# EAGLE board DotControl (EAGLE 7.7.0)
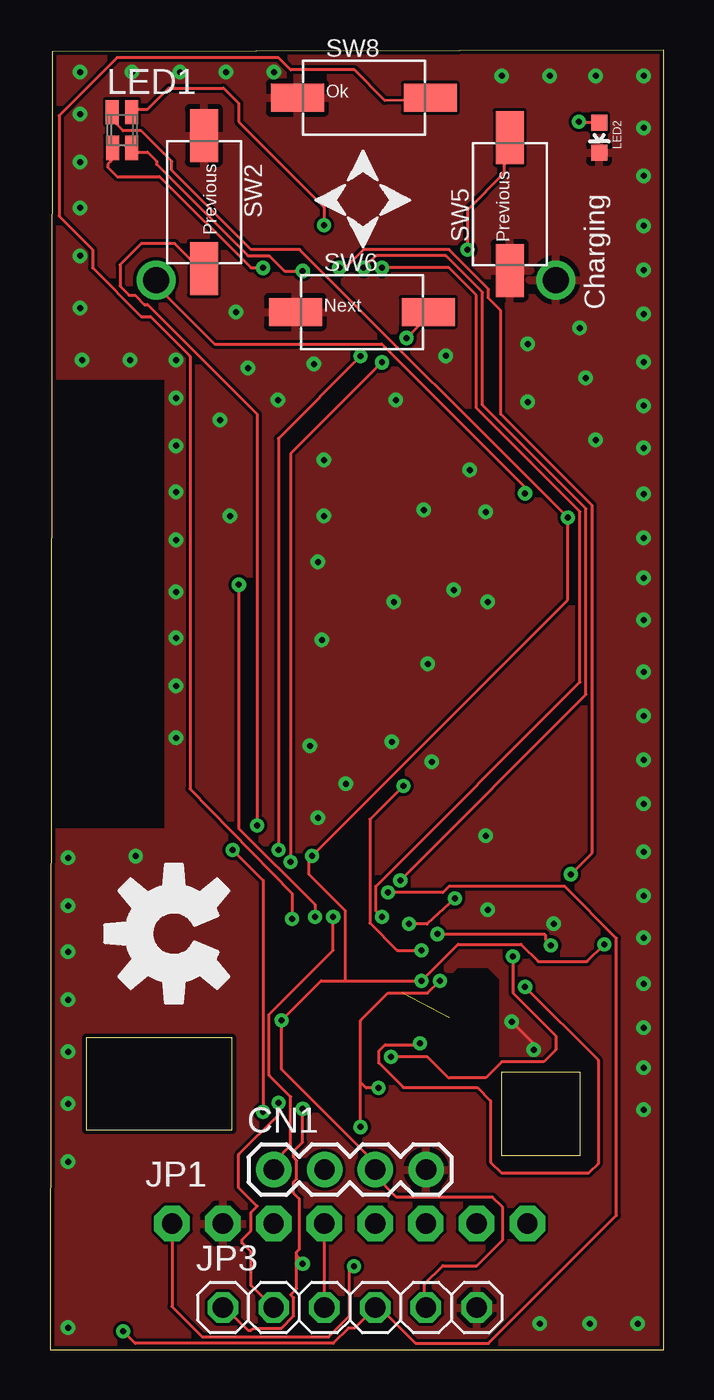
[diagram p0: board, top side]
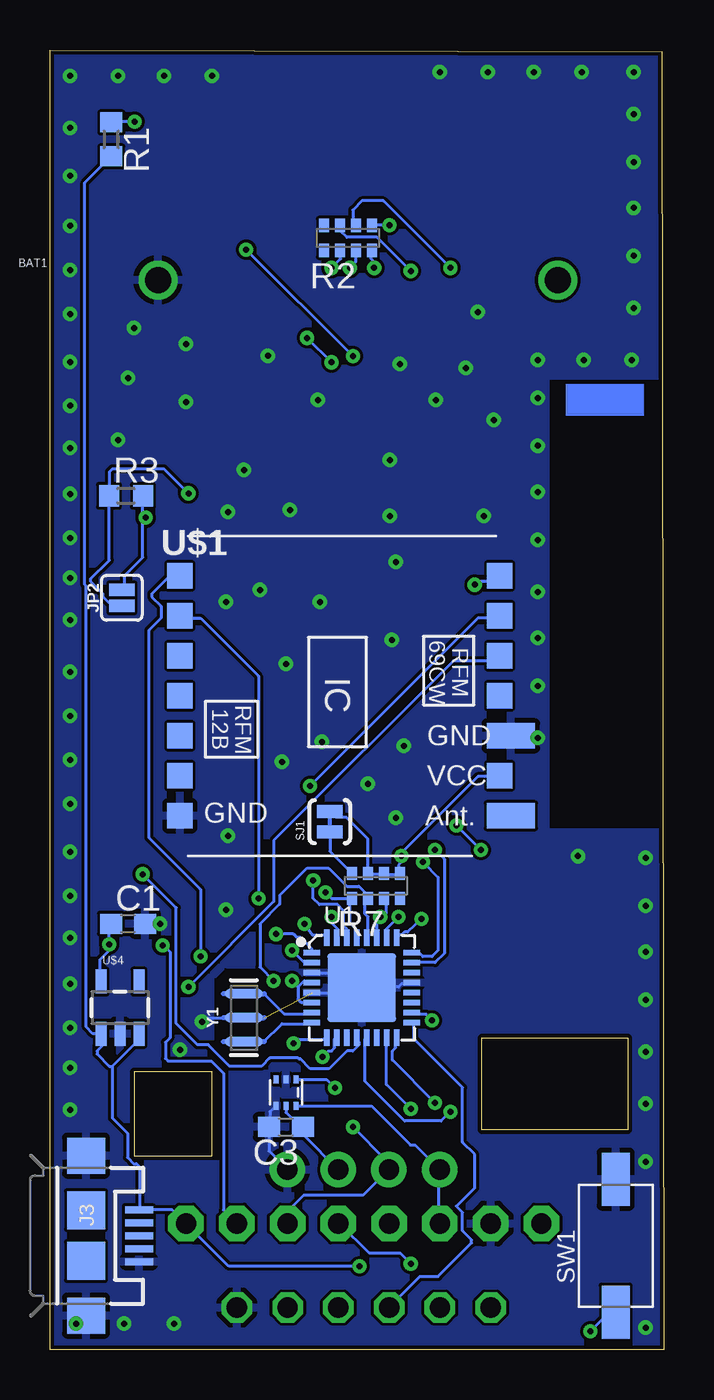
[diagram p1: board, bottom side, seen from below]

Size 30.7 x 65 mm. Coordinates in mm from the lower left corner, seen from the top.
Outline: 0,0 30.7,0 30.7,65 0.1,64.9 0,0
Outline: 22.6,13.9 26.5,13.9 26.5,9.7 22.6,9.7 22.6,13.9
Outline: 9.1,15.6 1.8,15.6 1.8,11 9.1,11 9.1,15.6
Copper layers (1*16): Top 0.035mm / dielectric 1.5mm / Bottom 0.035mm
Design rules "Mihai_default": minimum track width 6mil, minimum drill 0.3mm, track to track 6mil, track to pad 6mil, pad to pad 6mil, via to via 6mil, smd to smd 6mil, copper to edge 8mil, drill to drill 8mil, minimum pad ring 10mil, minimum via ring 8mil, stop-mask expansion 4mil, vias tented up to drill 0mil, thermal gap 10mil
tRestrict: area 17.1,14.4 to 22.4,19; area 0.4,26.1 to 5.7,48.5
bRestrict: area 17.1,14.4 to 22.4,19; area 0.4,26.1 to 5.7,48.5

## Footprints (pad centres in the part's own frame; a part is rotated, then mirrored left to right if it is on the bottom)
BATTCOM_20MM_PTH = drill 1.3: 1 20,0; 2 0,0
C0603 = smd 1.1 x 1: 1 -0.85,0; 2 0.85,0
1X04-BIG = drill 1.016 pad 1.778: 1 0,0; 2 2.54,0; 3 5.08,0; 4 7.62,0
USB-MICROB = smd 0.35 x 1.4: D+ 0,2.65; D- -0.65,2.65; GND 1.3,2.65; ID 0.65,2.65; VBUS -1.3,2.65 | smd 1.8 x 1.9: MT1 -4,0; MT2 4,0 | smd 1.9 x 1.9: P$1 -1.27,0; P$2 1.27,0
1X08-CLEANBIG = drill 1.016 pad 1.778 octagon: 1 -8.89,0; 2 -6.35,0; 3 -3.81,0; 4 -1.27,0; 5 1.27,0; 6 3.81,0; 7 6.35,0; 8 8.89,0
SMT-JUMPER_2_NO_SILK = smd 0.635 x 1.27: 1 -0.406,0; 2 0.406,0
1X06 = drill 1.016 octagon: 1 -6.35,0; 2 -3.81,0; 3 -1.27,0; 4 1.27,0; 5 3.81,0; 6 6.35,0
GM1WA55311A = smd 0.65 x 1.2: 1 0.477,0.9; 2 -0.475,-0.9; 3 0.475,-0.9; 4 -0.477,0.9
LED-0603 = smd 0.8 x 0.8: A 0,-0.75; C 0,0.75
R0603 = smd 1 x 1.1: 1 -0.85,0; 2 0.85,0
0603-ARV = smd 0.5 x 0.65: 1 -1.2,-0.625; 2 -0.4,-0.625; 3 0.4,-0.625; 4 1.2,-0.625; 5 1.2,0.625; 6 0.4,0.625; 7 -0.4,0.625; 8 -1.2,0.625
SJ_2S-TRACE = smd 0.635 x 1.27: 1 -0.508,0; 2 0.508,0
SW2-4.0-6.0X3.0X2.5MM = smd 2.65 x 1.4: 1 -3.325,0; 2 3.325,0
QFN32G-0.5-5X5MM = smd 0.813 x 0.279: 1 -2.5,1.75; 2 -2.5,1.25; 3 -2.5,0.75; 4 -2.5,0.25; 5 -2.5,-0.25; 6 -2.5,-0.75; 7 -2.5,-1.25; 8 -2.5,-1.75; 17 2.5,-1.75; 18 2.5,-1.25; 19 2.5,-0.75; 20 2.5,-0.25; 21 2.5,0.25; 22 2.5,0.75; 23 2.5,1.25; 24 2.5,1.75 | smd 0.279 x 0.813: 9 -1.75,-2.5; 10 -1.25,-2.5; 11 -0.75,-2.5; 12 -0.25,-2.5; 13 0.25,-2.5; 14 0.75,-2.5; 15 1.25,-2.5; 16 1.75,-2.5; 25 1.75,2.5; 26 1.25,2.5; 27 0.75,2.5; 28 0.25,2.5; 29 -0.25,2.5; 30 -0.75,2.5; 31 -1.25,2.5; 32 -1.75,2.5 | smd 3.429 x 3.429: 33 0,0
SOT563 = smd 0.25 x 0.4: 1 -0.5,-0.66; 2 0,-0.66; 3 0.5,-0.66; 4 0.5,0.66; 5 0,0.66; 6 -0.5,0.67
RFM12B/69CW = smd 2.413 x 1.27: ANT 9.06,-6; GND 9.06,-2 | smd 1.27 x 1.27: CLK -7.5,-2; FFIT -7.5,0; FFS -7.5,2; GND1 -7.5,-6; IRQ -7.5,4; NINT 8.5,0; RST -7.5,-4; SCK 8.5,4; SDI 8.5,2; SDO -7.5,6; SEL 8.5,6; VDD 8.5,-4
SOT23-5 = smd 0.55 x 1.2: 1 -0.95,-1.3; 2 0,-1.3; 3 0.95,-1.3; 4 0.95,1.3; 5 -0.95,1.3
RESONATOR-SMD-3.2X1.3 = smd 0.45 x 1.905: 1 -1.2,0; 2 0,0; 3 1.2,0

## Placement (x,y rotation side)
BAT1  [BATTCOM_20MM_PTH]  25.3,53.5 0 bottom
C1  [C0603]  26.8,21.3 0 bottom
C3  0.1uF  [C0603]  18.9,11.13 180 bottom
CN1  1X4-BIG  [1X04-BIG]  11.2,9 0 top
J3  USB-MICROB  [USB-MICROB]  28.9,5.7 270 bottom
JP1  [1X08-CLEANBIG]  15,6.3 0 top
JP2  JUMPER-SMT_2_NO_SILK  [SMT-JUMPER_2_NO_SILK]  27.1,37.6 90 bottom
JP3  [1X06]  15,2.1 0 top
LED1  GM1WA55311A  [GM1WA55311A]  3.6,61 0 top
LED2  [LED-0603]  27.48,60.6 180 top
R1  [R0603]  27.64,60.53 270 bottom
R2  [0603-ARV]  15.8,55.6 0 bottom
R3  [R0603]  26.9,42.7 0 bottom
R7  4.7kΩ  [0603-ARV]  14.4,23.2 0 bottom
SJ1  SOLDERJUMPERTRACE  [SJ_2S-TRACE]  16.7,26.4 90 bottom
SW1  [SW2-4.0-6.0X3.0X2.5MM]  2.4,5.2 90 bottom
SW2  Previous  [SW2-4.0-6.0X3.0X2.5MM]  7.7,57.4 270 top
SW5  Previous  [SW2-4.0-6.0X3.0X2.5MM]  23,57.3 90 top
SW6  Next  [SW2-4.0-6.0X3.0X2.5MM]  15.6,51.9 0 top
SW8  Ok  [SW2-4.0-6.0X3.0X2.5MM]  15.7,62.61 0 top
U1  ATMEGA328P-MU-QFN32  [QFN32G-0.5-5X5MM]  15.1,18.1 0 bottom
U2  TMP102  [SOT563]  18.9,12.85 180 bottom
U$1  RFM12B/69CW  [RFM12B/69CW]  16.7,32.7 0 bottom
U$2  OSHW-LOGOL  [OSHW-LOGO-L]  6.2,20.8 90 top
U$4  LDCL015  [SOT23-5]  27.2,17.1 0 bottom
Y1  [RESONATOR-SMD-3.2X1.3]  21,16.6 90 bottom

## Library data of the parts
BAT1 = Battery
C1 = rcl
C3 R1 R3 = resistor
CN1 JP1 JP3 = adafruit
J3 = SparkFun-Retired; PROD_ID: CONN-09505
JP2 = SparkFun-Jumpers
LED1 = led
LED2 R2 R7 SJ1 U2 U$2 = SparkFun
SW1 SW2 SW5 SW6 SW8 = Seeed-OPL-Switch
U1 = Seeed-OPL-ic; MPN: ATMEGA328P-MU
U$1 = rfm12b_withoutPlanes
U$4 = LDCL015
Y1 = SparkFun-Clocks

## Nets
+3V3: C1.1 C3.1 CN1.3 JP2.2 JP3.5 LED1.4 R3.2 R7.5 R7.6 R7.7 SJ1.2 U1.4 U1.6 U1.18 U2.5 U$1.VDD U$4.5
+5V: J3.VBUS JP1.1 JP1.8 R1.2 U$4.1 U$4.3
ADC: U1.19
ADCENA: SW2.2 U1.13
BUZZER: SW5.2 U1.23
DISPLAY_A0: JP1.5
DISPLAY_CS: JP1.3
DISPLAY_RESET: JP1.4
DISPLAY_SDA: JP1.6
GND: BAT1.2 C1.2 C3.2 CN1.4 J3.GND J3.MT1 J3.MT2 JP1.2 JP3.6 LED2.C SW1.2 SW2.1 SW5.1 SW6.1 SW8.1 U1.3 U1.5 U1.21 U1.33 U2.2 U2.4 U$1.GND U$1.GND1 U$4.2 Y1.2
INT_MULTIPLE: U2.3
LED: R2.4 U1.12
LIGHT_SENSE: U1.22
MISO: JP3.2 U1.16
MOSI: JP3.1 U1.15
MOVE_INT: SW8.2 U1.25
N$1: LED2.A R1.1
N$2: R7.8 SJ1.1
N$6: U1.7 Y1.3
N$8: U1.8 Y1.1
N$9: LED1.3 R2.7
N$10: LED1.2 R2.6
N$15: LED1.1 R2.5
N$16: BAT1.1 JP2.1 R3.1
OUTA: U1.14
OUTB: SW6.2 U1.24
PUSH: JP1.7 U1.1
RADIO_ON: U1.11
RIRQ: U1.32 U$1.IRQ
RSCK: U1.2 U$1.SCK
RSDI: U1.9 U$1.SDI
RSDO: U1.10 U$1.SDO
RSEL: U1.26 U$1.SEL
RST: JP3.4 R7.1 SW1.1 U1.29
RXD: R2.3 U1.30
SCK: JP3.3 U1.17
SCL: CN1.2 R7.2 U1.28 U2.1
SDA: CN1.1 R7.3 U1.27 U2.6
TXD: R2.2 U1.31

## Tracks (layer width: path | path; a pad name or v marks a point on that pad's centre or on a via)
+3V3  (via drill 0.3)
  Top 0.152: LED1.4 3.2,61.87 3.2,61.42 3.66,60.96 4.57,60.96 6.1,59.44 6.1,58.98 10.06,55.02 12.5,55.02 v25.91,41.6 25.91,37.49 v13.11,24.69 12.95,24.69 12.95,23.77 14.78,21.95 14.78,18.44 | CN1.3 16.15,9.14 16.15,9.45 11.58,14.02 v11.58,16.46 13.56,18.44 14.78,18.44 | 14.78,18.44 v18.59,18.44 20.42,20.27 23.57,20.27 24.43,19.41 26.87,19.41 v27.74,20.27 | 16.31,8.69 16.31,8.99 CN1.3 | JP3.5 18.75,2.13 18.75,3.28 19.66,4.19 21.36,4.19 22.66,5.49 22.66,7.11 22.15,7.62 17.35,7.62 16.28,8.69 CN1.3
  Bottom 0.152: 26.06,41.6 26.06,39.62 26.98,38.71 26.98,38.25 26.82,38.1 26.98,37.95 JP2.2 | 26.06,41.6 26.06,42.67 R3.2 | 26.06,41.6 v25.91,41.6 | U$1.VDD 8.23,28.65 9.3,28.65 13.11,24.84 v13.11,24.69 13.11,24.38 13.26,24.23 13.26,23.93 R7.5 13.26,23.77 13.87,23.77 R7.6 14.02,23.77 14.78,23.77 R7.7 14.8,25.54 15.88,26.62 16.41,26.62 SJ1.2 | C1.1 27.74,21.18 v27.74,20.27 27.74,19.96 28.19,19.51 28.19,18.44 U$4.5 | 18.29,18.14 18.29,17.53 18.14,17.37 17.68,17.37 U1.6 | 18.29,18.14 17.98,18.44 17.83,18.29 17.68,18.29 U1.4 | v11.58,16.46 11.89,16.76 12.5,16.76 U1.18 | v18.59,18.44 18.29,18.14 | U2.5 18.9,11.86 18.62,11.58 18.5,11.58 C3.1 18.05,10.77 CN1.3
+5V  (via drill 0.3)
  Top 0.152: JP1.1 6.11,2.15 7.62,0.64 13.95,0.64 14.99,1.68 14.99,3.94 v15.21,4.17
  Bottom 0.152: 27.58,14.17 26.36,15.39 26.36,15.7 U$4.3 | 27.58,14.17 27.74,14.17 28.35,14.78 28.35,14.94 28.04,15.24 28.04,15.7 U$4.1 28.55,15.8 28.88,16.13 28.88,38.18 28.96,38.25 28.96,58.36 R1.2 | 26.21,7.01 26.21,9.14 26.36,9.3 26.52,9.3 26.82,9.6 26.82,10.82 27.58,11.58 27.58,14.17 | 26.21,7.01 J3.VBUS | v15.21,4.17 21.76,4.17 JP1.8 24.6,7.01 26.21,7.01
ADCENA  (via drill 0.3)
  Top 0.152: v10.67,11.89 10.67,23.47 v9.14,24.99 | v10.36,26.21 10.36,46.79 4.88,52.27 4.72,52.27 4.27,52.73 3.96,52.73 3.5,53.19 3.5,54.25 4.57,55.32 6.25,55.32 7.62,53.95 SW2.2
  Bottom 0.152: v10.67,11.89 11.12,11.43 12.95,11.43 14.94,13.41 14.94,15.54 U1.13 | v10.36,26.21 v9.14,24.99
BUZZER  (via drill 0.3)
  Top 0.152: v11.43,24.99 11.43,45.57 v15.54,49.68 | v20.88,55.02 20.88,57 22.71,58.83 22.71,60.35 22.86,60.5 SW5.2
  Bottom 0.152: v11.43,24.99 10.97,24.54 10.97,19.81 11.43,19.36 12.5,19.36 U1.23 | v20.88,55.02 v15.54,49.68
GND  (via drill 0.3)  (1 unrouted)
  Top 0.152: v23.1,16.4 24.2,15.3 v24.2,15
  Bottom 0.152: U1.33 15.09,18.14 13.26,18.14 13.11,18.29 12.8,18.29 U1.21 | U1.5 15.35,17.85 U1.33 | U1.3 15.85,18.85 U1.33 | v24.2,15 24.3,14.9 24.3,14.7 | v23.1,16.4 22.9,16.6 Y1.2 | U2.4 19.7,11.89 C3.2 19.75,9.93 CN1.4
  other vias: 29.7,12 29.7,14.1 29.7,16.1 29.7,18.3 29.7,20.6 29.7,22.7 29.7,24.9 29.7,27.3 29.7,29.5 29.7,31.7 29.7,33.9 29.7,36.5 29.7,38.6 29.7,40.6 29.7,42.8 29.7,45.1 29.7,47.2 29.7,49.4 29.7,51.8 29.7,54 29.7,56.2 29.7,58.7 29.7,61.1 29.7,63.7 27.3,63.7 25,63.7 22.6,63.7 11.2,63.9 8.8,63.9 6.5,63.9 4.1,63.9 1.5,63.9 1.5,61.8 1.5,59.4 1.5,57.1 1.5,54.7 1.5,52.1 6.3,47.6 6.3,45.2 6.3,42.9 6.3,40.5 6.3,37.9 1.6,49.5 4,49.5 6.3,49.5 0.9,24.6 0.9,22.2 0.9,19.9 0.9,17.5 0.9,14.9 0.9,12.3 0.9,9.4 29.4,1.3 24.5,1.3 27,1.3 0.9,1.1 6.3,35.6 6.3,33.2 6.3,30.6 9.9,49.1 11.4,47.5 13.2,49.3 8.5,46.5 17.3,47.5 13.7,44.5 13.7,41.7 13.4,39.4 13.6,35.5 9,41.7 21,44 18.7,42 21.8,41.9 20.2,38 21.9,37.4 18.9,34.3 17.2,37.4 17.1,30.4 13.4,26.6 13,30.2 14.8,28.3 19.1,29.4 21.8,25.7 21.9,22 25.2,21.3 23.9,47.4 23.9,50.3 26.5,51.1 26.8,48.6 27.3,45.5 9.3,51.9 19.8,49.7 4.28,24.68
  pour Top: 0.1,0 30.6,0 30.6,65.1 0.1,65.1
  pour Bottom: 0,0 30.7,0 30.7,65.2 0,65.2
LED  (via drill 0.3)
  Top 0.152: v14.48,54.1 14.78,54.1 15.7,55.02 19.96,55.02 21.95,53.03 21.95,52.58 22.55,51.97 22.55,46.79 27.13,42.22 27.13,24.84 v26.06,23.77
  Bottom 0.152: v14.48,54.1 14.48,54.41 14.63,54.56 14.63,54.86 R2.4 | v26.06,23.77 24.38,22.1 24.38,16.31 23.32,15.24 22.78,15.24 21.72,14.17 20.12,14.17 19.71,14.58 18.29,14.58 18.24,14.53 18.16,14.53 17.68,14.05 16.74,14.05 15.85,14.94 15.54,14.94 15.24,15.24 15.24,15.39 15.39,15.54 U1.12
MISO  (via drill 0.3)
  Top 0.152: v11.43,12.34 11.43,11.73 9.45,9.75 9.45,8.08 10.36,7.16 10.06,6.86 10.06,5.94 9.6,5.49 9.6,5.33 10.06,4.88 10.06,3.2 11.12,2.13 JP3.2
  Bottom 0.152: v11.43,12.34 13.56,14.48 13.56,14.94 13.41,15.09 13.41,15.54 U1.16
MOSI  (via drill 0.3)
  Top 0.152: v12.65,12.04 12.65,10.36 12.19,9.91 12.19,9.6 12.34,9.45 12.34,8.53 12.19,8.38 12.19,7.82 12.47,7.54 12.47,5 12.34,4.88 12.34,3.05 12.04,2.74 12.19,2.59 12.19,1.68 11.58,1.07 10.21,1.07 10.06,0.96 9.91,0.96 8.69,2.13 JP3.1
  Bottom 0.152: v12.65,12.04 13.87,13.26 13.87,15.54 U1.15
MOVE_INT  (via drill 0.3)
  Top 0.152: v12.12,21.54 12.12,22.81 7.01,28.04 7.01,49.68 5.03,51.66 4.57,51.66 2.13,54.1 2.13,55.02 0.46,56.69 0.46,61.72 3.35,64.62 11.43,64.62 12.04,64.01 15.24,64.01 16.74,62.48 18.54,62.46 SW8.2
  Bottom 0.152: v12.12,21.54 12.8,20.88 12.95,20.88 13.11,20.73 13.26,20.73 U1.25
N$1  (via drill 0.3)
  Top 0.152: LED2.A 26.53,61.35 v26.47,61.42
  Bottom 0.152: v26.47,61.42 27.6,61.42 R1.1
N$2
  Bottom 0.152: SJ1.1 16.7,24.93 R7.8
N$4
  Top 0.152: 13.74,2.11 13.74,6.3
N$5
  Bottom 0.152: 13.77,8.99 15.04,7.72 18.01,7.72 18.87,6.86 18.87,6.25
N$6
  Bottom 0.152: 19.98,17.8 19.98,17.78 19,16.8 17.65,16.8 U1.7
N$7  (via drill 0.3)
  Top 0.152: v12.65,4.29 12.65,4.42 12.34,4.72
  Bottom 0.152: 16.31,6.3 16.2,6.3 14.73,4.83 13.18,4.83 v12.65,4.29
N$8
  Bottom 0.152: 19.98,15.4 19.98,15.42 19.1,16.3 17.65,16.3 U1.8
N$9  (via drill 0.3)
  Top 0.152: v12.65,53.95 11.73,53.95 10.97,54.71 9.91,54.71 5.33,59.28 5.33,59.44 4.88,59.89 4.27,59.89 4.12,60.05 LED1.3
  Bottom 0.152: v12.65,53.95 14.33,55.63 15.85,55.63 16.15,55.93 16.15,56.08 R2.7
N$10  (via drill 0.3)
  Top 0.152: v10.67,54.1 10.06,54.1 5.49,58.67 3.35,58.67 2.9,59.13 2.9,59.28 3.05,59.44 3.05,60.05 LED1.2
  Bottom 0.152: v10.67,54.1 14.02,57.45 15.09,57.45 15.54,57 15.54,56.24 R2.6
N$11
  Bottom 0.152: 11.18,8.99 11.25,8.99 11.25,6.3
N$15  (via drill 0.3)
  Top 0.152: v13.72,56.24 13.72,57.15 9.45,61.42 9.45,62.33 8.69,63.09 5.94,63.09 4.88,62.03 4.12,62.03 LED1.1
  Bottom 0.152: v13.72,56.24 14.48,56.24 R2.5
N$16  (via drill 0.3)
  Top 0.152: v23.77,42.82 23.77,43.13 16.61,50.29 8.23,50.29 5.33,53.19 5.33,53.49 BAT1.1
  Bottom 0.152: JP2.1 27.13,37.34 27.74,37.34 28.04,37.64 28.04,37.8 28.65,38.41 28.65,38.56 27.74,39.47 27.74,42.67 R3.1 27.74,42.82 27.74,43.89 27.58,44.04 24.99,44.04 v23.77,42.82
OUTB  (via drill 0.3)
  Top 0.152: v12.04,24.38 12.04,44.81 v16.61,49.38 | v17.83,50.6 19.05,51.82 SW6.2
  Bottom 0.152: v12.04,24.38 11.28,23.62 11.28,19.96 11.58,19.66 12.04,19.66 12.19,19.81 12.5,19.81 U1.24 | v17.83,50.6 v16.61,49.38
PUSH  (via drill 0.3)
  Top 0.152: v19.38,20.78 24.74,20.78 24.79,20.73 24.79,20.5 v25.07,20.22
  Bottom 0.152: U1.1 17.6,20.04 18.19,20.62 18.36,20.62 18.52,20.78 v19.38,20.78 | v25.07,20.22 25.02,20.22 24.69,19.89 24.69,15.6 24.92,15.37 24.92,14.55 24.79,14.43 22.63,14.43 22.02,13.82 22.02,6.97 JP1.7
RIRQ  (via drill 0.3)
  Top 0.152: v17.96,21.29 18.87,21.29 v20.27,22.55
  Bottom 0.152: v17.96,21.29 17.55,20.73 16.92,20.73 U1.32 | v20.27,22.55 20.27,33.68 23.16,36.58 24.08,36.58 U$1.IRQ
RSCK  (via drill 0.3)
  Top 0.152: v18.59,19.96 17.37,19.96 16,21.34 16,26.52 v17.68,28.19
  Bottom 0.152: v18.59,19.96 17.98,19.36 17.68,19.36 U1.2 | v17.68,28.19 9.3,36.58 8.23,36.58 U$1.SCK
RSDI  (via drill 0.3)
  Top 0.152: v18.52,15.32 18.39,15.24 16.76,15.24 16.46,14.94 16.46,14.33 17.68,13.11 21.39,13.11 22.05,12.45 22.05,9.37 22.58,8.84 26.98,8.84 27.43,9.3 27.43,14.48 v23.77,18.14
  Bottom 0.152: v18.52,15.32 18.26,15.52 17.02,15.52 16.92,15.54 U1.9 | v23.77,18.14 19.51,22.4 19.51,25.45 10.52,34.44 8.38,34.44 8.23,34.59 U$1.SDI
RSDO  (via drill 0.3)
  Top 0.152: v17.07,14.63 18.9,14.63 19.96,13.56 20,13.6 21.8,13.6 22.6,14.4 24.7,14.4 25.3,15 25.3,15.7 23.16,17.84 v23.16,19.66
  Bottom 0.152: v17.07,14.63 16.76,14.94 16.61,14.94 16.46,15.09 16.46,15.54 U1.10 | v23.16,19.66 23.16,23.01 25.76,25.6 25.76,35.97 25.15,36.58 25.15,37.19 25.6,37.64 25.6,37.8 24.84,38.56 24.23,38.56 U$1.SDO
RSEL  (via drill 0.3)
  Top 0.152: v13.26,21.64 13.26,22.25 9.45,26.06 v9.45,38.25
  Bottom 0.152: v13.26,21.64 13.87,21.03 13.87,20.73 U1.26 | v9.45,38.25 9.3,38.41 8.38,38.41 8.23,38.56 U$1.SEL
RST  (via drill 0.3)
  Top 0.152: v16.92,22.86 19.66,22.86 19.96,23.16 25.76,23.16 28.35,20.57 28.35,6.71 21.95,0.3 18.29,0.3 16.61,1.98 16.31,1.98 JP3.4 16.15,1.98 15.24,1.07 14.94,1.07 14.17,0.3 4.27,0.3 v3.66,0.91
  Bottom 0.152: 15.7,22.55 15.7,21.34 15.39,21.03 15.39,20.73 U1.29 | 15.7,22.55 16.61,22.55 v16.92,22.86 | 15.7,22.55 R7.1 | v3.66,0.91 2.74,1.83 2.44,1.83 SW1.1
RXD  (via drill 0.3)
  Top 0.152: v15.7,54.1 16.31,54.71 19.81,54.71 21.64,52.88 21.64,47.24 26.82,42.06 26.82,32.77 v17.53,23.47
  Bottom 0.152: v15.7,54.1 15.39,54.41 15.39,54.86 R2.3 | v17.53,23.47 17.53,22.55 17.22,22.25 16.31,22.25 16,21.95 16,21.18 15.85,21.03 15.85,20.73 U1.30
SCK
  Bottom 0.152: U1.17 12.5,16.31 12.5,15.54 10.06,13.11 10.06,10.36 9.45,9.75 9.45,8.08 10.36,7.16 10.06,6.86 10.06,5.94 9.6,5.49 9.6,5.33 11.28,3.66 12.19,3.66 13.72,2.13 JP3.3
SCL  (via drill 0.3)
  Top 0.152: v19.51,18.44 18.9,17.83 16.92,17.83 15.54,16.46 15.54,13.36 | v15.54,11.12 15.54,13.36 | v16.43,13.08 15.82,13.08 15.54,13.36
  Bottom 0.152: U1.28 14.78,20.73 14.78,21.64 14.94,21.79 14.94,22.55 R7.2 14.94,22.71 14.94,22.86 15.24,23.16 15.85,23.16 16.76,24.08 17.83,24.08 19.2,22.71 19.2,22.28 20.19,21.29 20.19,19.13 v19.51,18.44 | v15.54,11.12 13.87,9.45 13.87,9.14 CN1.2 | U2.1 16.86,13.51 v16.43,13.08
SDA  (via drill 0.3)
  Top 0.152: v14.17,21.64 14.17,19.96 10.97,16.76 10.97,13.72 12.04,12.65 12.04,10.21 11.28,9.45 11.28,9.14 CN1.1
  Bottom 0.152: 14.02,21.64 14.33,21.34 14.33,20.73 U1.27 | 14.02,21.64 13.87,21.79 13.87,22.55 R7.3 | v14.17,21.64 14.02,21.64 | U2.6 14.62,12.18 12.68,10.24 12.44,10.24 CN1.1
TXD  (via drill 0.3)
  Top 0.152: v16.61,54.1 19.96,54.1 21.34,52.73 21.34,47.09 26.52,41.91 26.52,33.38 16.31,23.16 16.31,21.95 v16.61,21.64
  Bottom 0.152: v16.61,54.1 16.15,54.56 16.15,54.86 R2.2 | v16.61,21.64 16.61,21.34 16.31,21.03 16.31,20.73 U1.31
(copper drawn outside any net)
  shapes: Bottom area x1

## Text on the board
tPlace: Don't forget to connect 1.44" display's pins | Charging